# Altium PCB Board.PcbDoc
Units mm, origin at the board's own origin, x right, y up, seen from the top; angles counter-clockwise.
Board outline 40.85 x 65.95 mm, 2 copper layers (Top Layer, Bottom Layer); 17 components, 21 nets, 66 pads, 0 vias.
Unrouted connection lines stored in the file: 15.
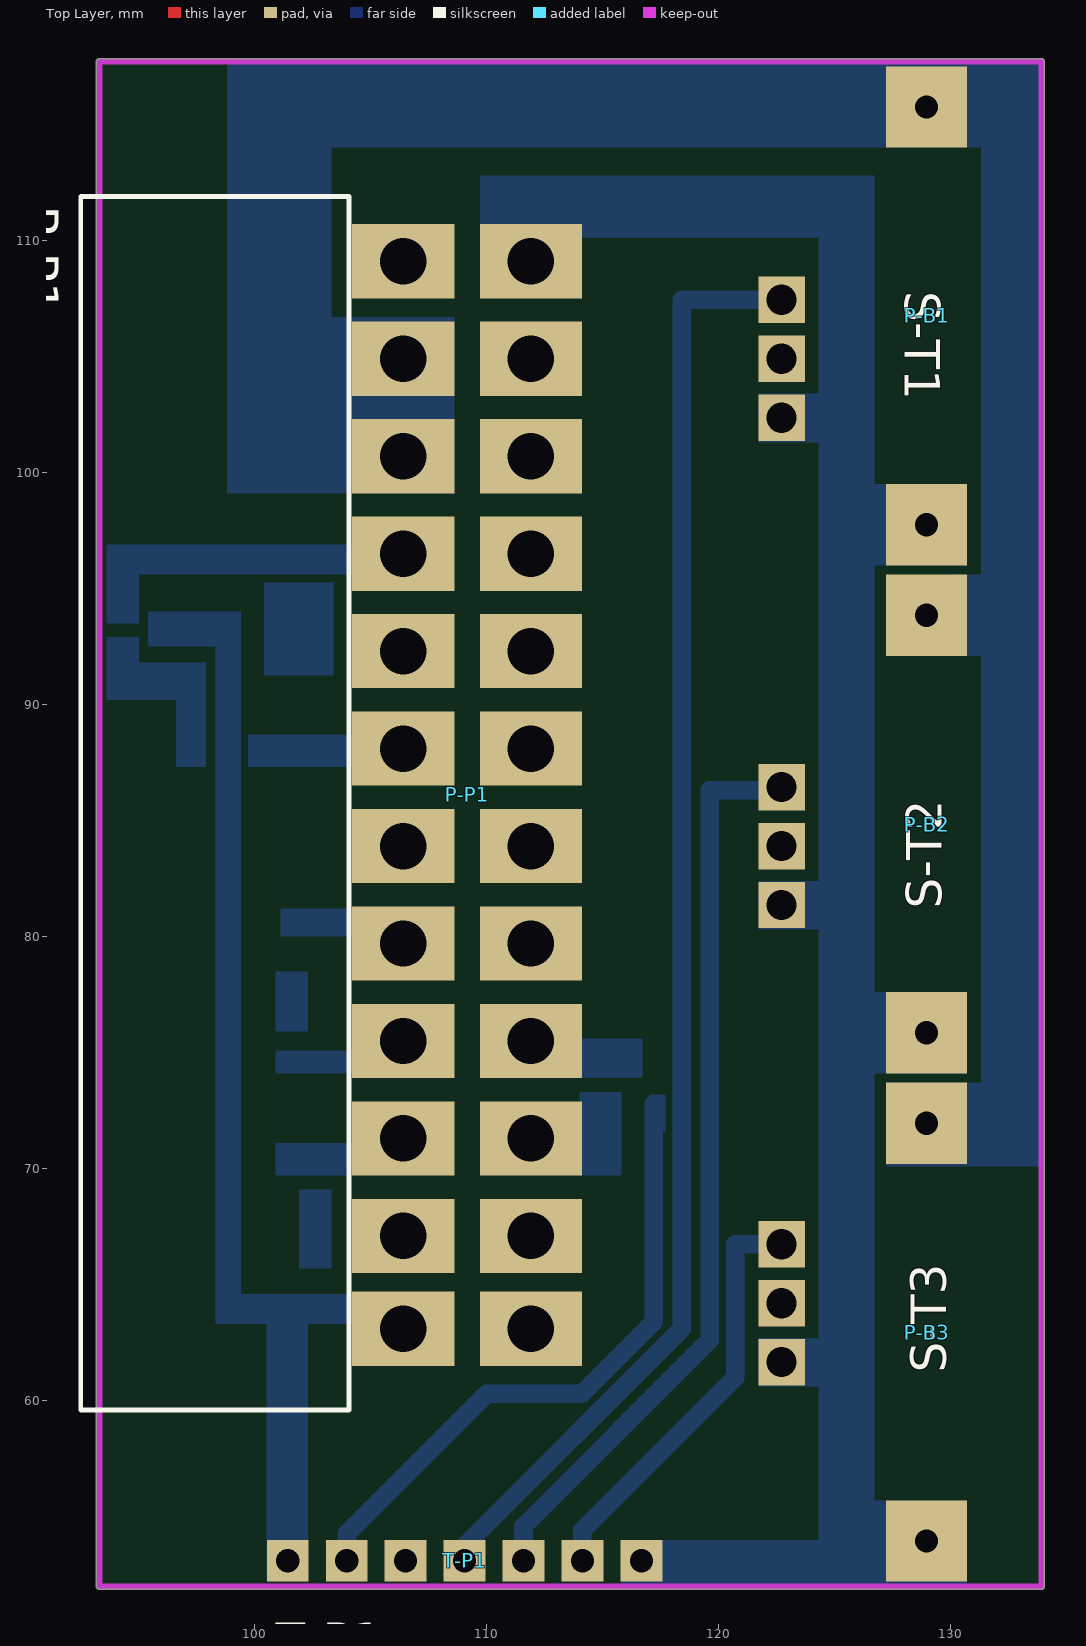
[diagram p0: Top Layer view]
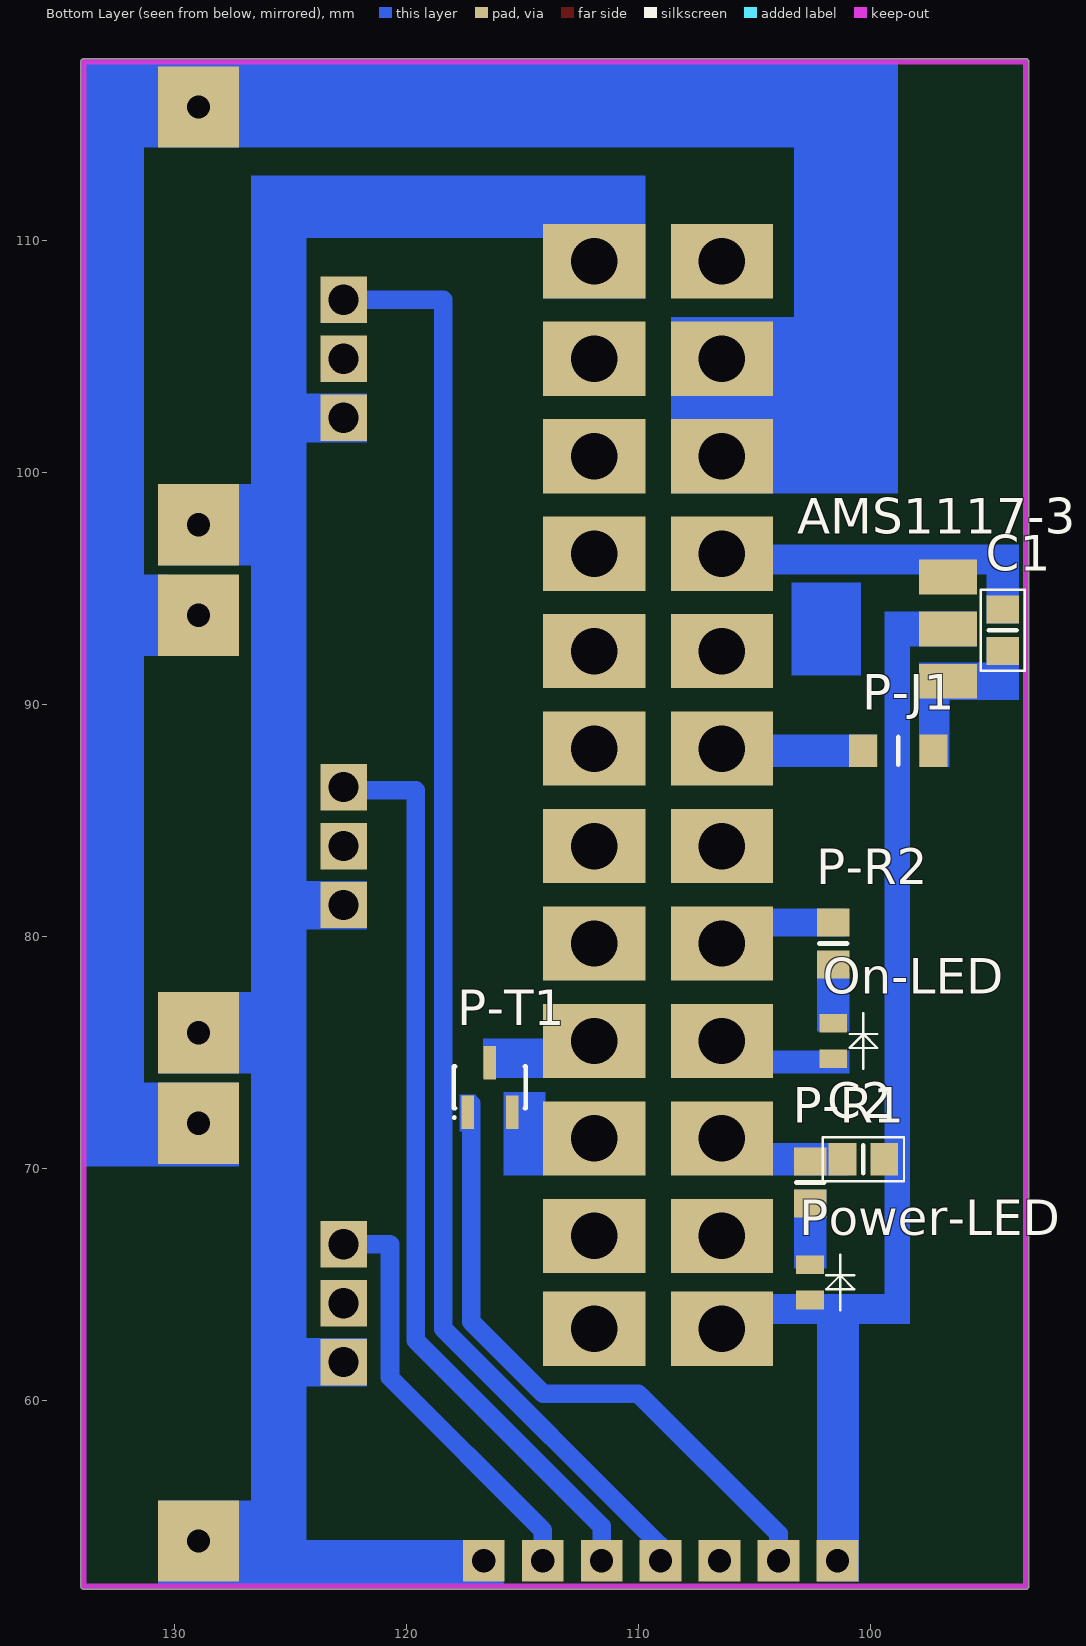
[diagram p1: Bottom Layer view, seen from below]

## Layer stack, top to bottom
Top Solder: solder mask 0.0102, Solder Resist, Dk 3.5
Top Layer: signal copper 0.0356
Dielectric 1: dielectric 0.32, FR-4, Dk 4.8
Bottom Layer: signal copper 0.0356
Bottom Solder: solder mask 0.0102, Solder Resist, Dk 3.5

## Board outline
93.173,52 ccw(c93.3,52) 93.3,51.873 133.9,51.873 ccw(c133.9,52) 134.027,52 ccw(c133.9,52) 134.027,52.001 134.027,117.7 ccw(c133.9,117.7) 133.9,117.827 93.3,117.827 ccw(c93.3,117.7) 93.173,117.7

## Design rules (kind name [scope] priority, off if disabled: settings)
Clearance [All] p1: gap=0.254
PolygonConnect [All] p1: connectstyle=Relief reliefconductorwidth=0.254 reliefentries=4 polygonreliefangle="90 Angle" airgapwidth=0.254
RoutingVias [All] p1: holewidth=0.711 width=1.27 viastyle="Through Hole" minholewidth=0.711 minwidth=1.27 maxholewidth=0.711 maxwidth=1.27
SolderMaskExpansion [All] p1: expansion=0.102
UnpouredPolygon [All] p1: allowunpoured=FALSE
Width [All] p1: maxlimit=0.254 minlimit=0.254 preferedwidth=0.254
29 further rules are at their usual default settings.

## Classes and differential pairs
component class "uC Power Supply": AMS1117-3.3 C1 C2
component class ATX: On-LED P-B1 P-B2 P-B3 P-J1 P-P1 P-R1 P-R2 P-T1 Power-LED
component class "FETs / IGBTs": F-T1 F-T2 F-T3 F-U1 S-T1 S-T2 S-T3
component class Top: T-P1

## Components (designator, comment, footprint, x,y, rotation, side; value= is the part's Value field where it differs from the comment)
AMS1117-3.3 "T1" SOT-223-3 95.9,90 r90 bottom
C1 "22uF" "C 0805 / 2012" 94.3,93.2 r90 bottom
C2 "22uF" "C 0805 / 2012" 100.3,70.4 r180 bottom
On-LED "SMD Green" "LED 0603" 101.6,75.5 r90 bottom
P-B1 "Flying Fish XL6009" "Flying Fish XL6009 small" 146.2,109.5 r0 top
P-B2 "Flying Fish XL6009" "Flying Fish XL6009 small" 146.2,87.6 r0 top
P-B3 "Flying Fish XL6009" "Flying Fish XL6009 small" 146.2,65.7 r0 top
P-J1 "0R" "R 0805 / 2012 wide" 98.8,88 r180 bottom
P-P1 "ATX" ATX 106.4,109.1 r270 top
P-R1 "?R" "R 0805 / 2012" 102.6,69.4 r270 bottom
P-R2 "?R" "R 0805 / 2012" 101.6,79.7 r270 bottom
P-T1 "2N7000" SOT-23-3 116.4,73.5 r180 bottom
Power-LED "SMD Green" "LED 0603" 102.6,65.1 r90 bottom
S-T1 "K03H1202" TO-220-AB 122.7,104.9 r270 top
S-T2 "K03H1202" TO-220-AB 122.7,83.9 r270 top
S-T3 "K03H1202" TO-220-AB 122.7,64.2 r270 top
T-P1 "Header 1x7" "Header 1x7" 106.5,53.1 r0 top

## Footprints (in the part's own frame and the unit in brackets; to place one, negate y for a bottom-side part, rotate by r counter-clockwise, add the part's x,y. Pads: shape width x height; smd on the part's side, far side on the other; paste and mask are expansions set on the pad)
ATX [mm] "Molex MINI-FIT JR. 24-polig"
  rect 3.2x4.4 hole 2 paste+0: 1(46,0) 2(42,0) 3(37.8,0) 4(33.6,0) 5(29.4,0) 6(25.2,0) 7(21,0) 8(16.8,0) 9(12.6,0) 10(8.4,0) 11(4.2,0) 12(0,0) 13(46,5.5) 14(42,5.5) 15(37.8,5.5) 16(33.6,5.5) 17(29.4,5.5) 18(25.2,5.5) 19(21,5.5) 20(16.8,5.5) 21(12.6,5.5) 22(8.4,5.5) 23(4.2,5.5) 24(0,5.5)
  silkscreen extent -2.79,-13.9 49.5,-2.34, body extent -2.63,-13.97 49.37,5.96, height 12.4
"C 0805 / 2012" [mm] "Capacitor 0805 / 2012 (2.0 x 1.2 mm)"
  rect 1.2x1.4 smd: 1(-0.9,0) 2(0.9,0)
  silkscreen extent -1.75,-0.95 1.75,0.95, body extent -1,-0.62 1,0.63, height 0.78
"Flying Fish XL6009 small" [mm]
  rect 3.5x3.5 hole 1: IN+(-17.25,6.25) IN-(-17.25,-11.75)
"Header 1x7" [mm] "2.54mm"
  rect 1.8x1.8 hole 1: 1(-5.08,0) 2(-2.54,0) 3(0,0) 4(2.54,0) 5(5.08,0) 6(7.62,0) 7(10.16,0)
  body extent -6.35,-1.27 11.43,1.27, height 8.6
"LED 0603" [mm]
  rect 0.8x1.2 smd: 1(-0.762,0) 2(0.762,0)
  silkscreen extent -1.2,-1.9 1.2,-0.7, body extent -0.81,-0.45 0.89,0.45, height 0.75
"R 0805 / 2012" [mm] "Resistor 0805 / 2012 (2.0 x 1.2 mm)"
  rect 1.2x1.4 smd: 1(-0.9,0) 2(0.9,0)
  silkscreen extent 0,-0.6 0,0.6, body extent -1,-0.63 1,0.62, height 0.45
"R 0805 / 2012 wide" [mm] "Resistor 0805 / 2012 (2.0 x 1.2 mm)"
  rect 1.2x1.4 smd: 1(-1.524,0) 2(1.524,0)
  silkscreen extent 0,-0.6 0,0.6, body extent -1,-0.63 1,0.62, height 0.45
SOT-23-3 [mm]
  rect 0.55x1.45 smd: 1(-0.95,-1.075) 2(0.965,-1.067) 3(0,1.067)
  silkscreen extent -1.58,-1.35 1.55,0.9, body extent -1.49,-1.32 1.51,1.28, height 1.1
SOT-223-3 [mm]
  rect 1.5x2.5 smd: 1(1,0.75) 2(3.25,0.75) 3(5.5,0.75)
  Top Layer region: 1.25,7.5 5.25,7.5 5.25,4.5 1.25,4.5
  body extent -0.1,-0.22 6.6,7.08, height 1.8
TO-220-AB [mm]
  rect 2x2 hole 1.3: 1(-2.54,0) 2(0,0) 3(2.54,0)
  body extent -5.32,-1.7 5.33,3.1, height 21.5

## Part data
AMS1117-3.3: library part AMS1117
C1 C2: library part Capacitor
On-LED Power-LED: library part LED
P-J1 P-R1 P-R2: library part Resistor
P-P1: library part "ATX sorted"
P-T1: "N-FET"
S-T1 S-T2 S-T3: library part "FET N-Channel", "Enhancement Type"

## Nets (pads, with @x,y where several pads share a name; then routed paths per layer and width w, separated by ;. In a path a pad name is that pad's centre, name@x,y a point inside that pad or via, vN(x,y) a via of type N, cw(c..) or ccw(c..) an arc to the next point about the centre after c; other vN are vias at no path point)
+3.3V: AMS1117-3.3.2 C2.2 P-P1.1 P-P1.2 P-P1.12 P-P1.13 Power-LED.1 T-P1.1
+5V: On-LED.1 P-P1.4 P-P1.6 P-P1.21 P-P1.22 P-P1.23
+5VSB: AMS1117-3.3.3 C1.2 P-P1.9
+12V: P-B1.IN+ P-B2.IN+ P-B3.IN+ P-P1.10 P-P1.11
GND: P-B1.IN- P-B2.IN- P-B3.IN- P-J1.1 P-P1.3 P-P1.5 P-P1.7 P-P1.15 P-P1.17 P-P1.18 P-P1.19 P-P1.24 P-R1.1 P-R2.1 P-T1.2 S-T1.3 S-T2.3 S-T3.3 T-P1.7
NetAMS1117-3.3_1: AMS1117-3.3.1 C1.1 C2.1 P-J1.2
NetOn-LED_2: On-LED.2 P-R2.2
NetP-B1_OUT+: 
NetP-B2_OUT+: 
NetP-B3_OUT+: 
NetP-R1_2: P-R1.2 Power-LED.2
NetP-R3_1: T-P1.3
NetP-T1_1: P-T1.1 T-P1.2 | length 27.6
  Bottom Layer w0.8: T-P1.2 103.96,54.26 110,60.3 114.1,60.3 117.2,63.4 P-T1.1@117.2,72.8
NetS-T1_D: S-T1.2
NetS-T1_G: S-T1.1 T-P1.4 | length 62.5
  Bottom Layer w0.8: T-P1.4 109.04,53.74 118.4,63.1 118.4,107.44 S-T1.1
NetS-T2_D: S-T2.2
NetS-T2_G: S-T2.1 T-P1.5 | length 39.6
  Bottom Layer w0.8: T-P1.5 111.58,54.58 119.6,62.6 119.6,86.3 S-T2.1@122.7,86.3
NetS-T3_D: S-T3.2
NetS-T3_G: S-T3.1 T-P1.6 | length 18.4
  Bottom Layer w0.8: T-P1.6 114.12,54.42 120.7,61 120.7,66.74 S-T3.1
"POWER GOOD (5V)": P-P1.8
PS_ON: P-P1.16 P-T1.3
pads on no net: P-P1.14 P-P1.20

## Keep-outs
Keep-Out Layer:
  lines w0.254: 133.9,52 133.9,52 ; 133.9,52 93.3,52 93.3,117.7 133.9,117.7 133.9,52

## Other copper
Bottom Layer:
  rectangle net GND: 101.1,80 105.3,81.2
  rectangle net +5V: 100.9,74.1 106.1,75.1
  rectangle net NetOn-LED_2: 100.9,75.9 102.3,78.5
  rectangle net GND: 100.9,69.7 104.3,71.1
  rectangle net NetP-R1_2: 101.9,65.7 103.3,69.1
  rectangle net +3.3V: 99.2,63.3 105.4,64.6
  rectangle net +5VSB: 94.9,95.6 104.6,96.9
  rectangle net +12V: 98.8,99.1 108.6,106.7
  rectangle net +12V: 98.8,106.7 103.3,117.7
  rectangle net +12V: 103.3,114 133.9,117.7
  rectangle net GND: 109.7,107.5 114.1,112.8
  rectangle net GND: 114.1,110.1 126.7,112.8
  rectangle net GND: 124.3,52.1 126.7,110.1
  rectangle net +3.3V: 100.5,52.2 102.3,64.6
  rectangle net NetP-T1_1: 117,71.6 117.7,73.2
  rectangle net GND: 114,69.7 115.8,73.3
  rectangle net PS_ON: 113.4,73.9 116.7,75.6
  rectangle net GND: 126.7,52.1 130.7,55.7
  rectangle net GND: 126.6,74.1 130.7,77.6
  rectangle net GND: 126.6,96 130.7,99.5
  rectangle net +12V: 131.3,70.1 133.9,114
  rectangle net +12V: 130.2,92.1 131.4,95.6
  rectangle net +12V: 127.2,70.1 131.3,73.7
  rectangle net GND: 121.7,60.6 124.7,62.7
  rectangle net GND: 115.8,52.1 124.3,54
  rectangle net GND: 121.7,80.3 124.5,82.4
  rectangle net GND: 121.7,101.3 124.4,103.4
  rectangle net +3.3V: 95.4,92.5 99.4,94
  rectangle net +3.3V: 98.3,63.3 99.4,92.7
  rectangle net +5VSB: 93.6,93.5 95,96.9
  rectangle net NetAMS1117-3.3_1: 93.6,90.2 95,92.9
  rectangle net NetAMS1117-3.3_1: 95,90.2 97.9,91.8
  rectangle net NetAMS1117-3.3_1: 96.6,87.3 97.9,90.5
  rectangle net GND: 99.7,87.3 104.8,88.7